# Altium PCB PCB-MAKEY_MAKEY_PTITTEAM_v1.6.PcbDoc
Units mil, origin at the board's own origin, x right, y up, seen from the top; angles counter-clockwise.
Board outline 3500 x 1950 mil, 2 copper layers (Top Layer, Bottom Layer); 49 components, 59 nets, 156 pads, 46 vias.
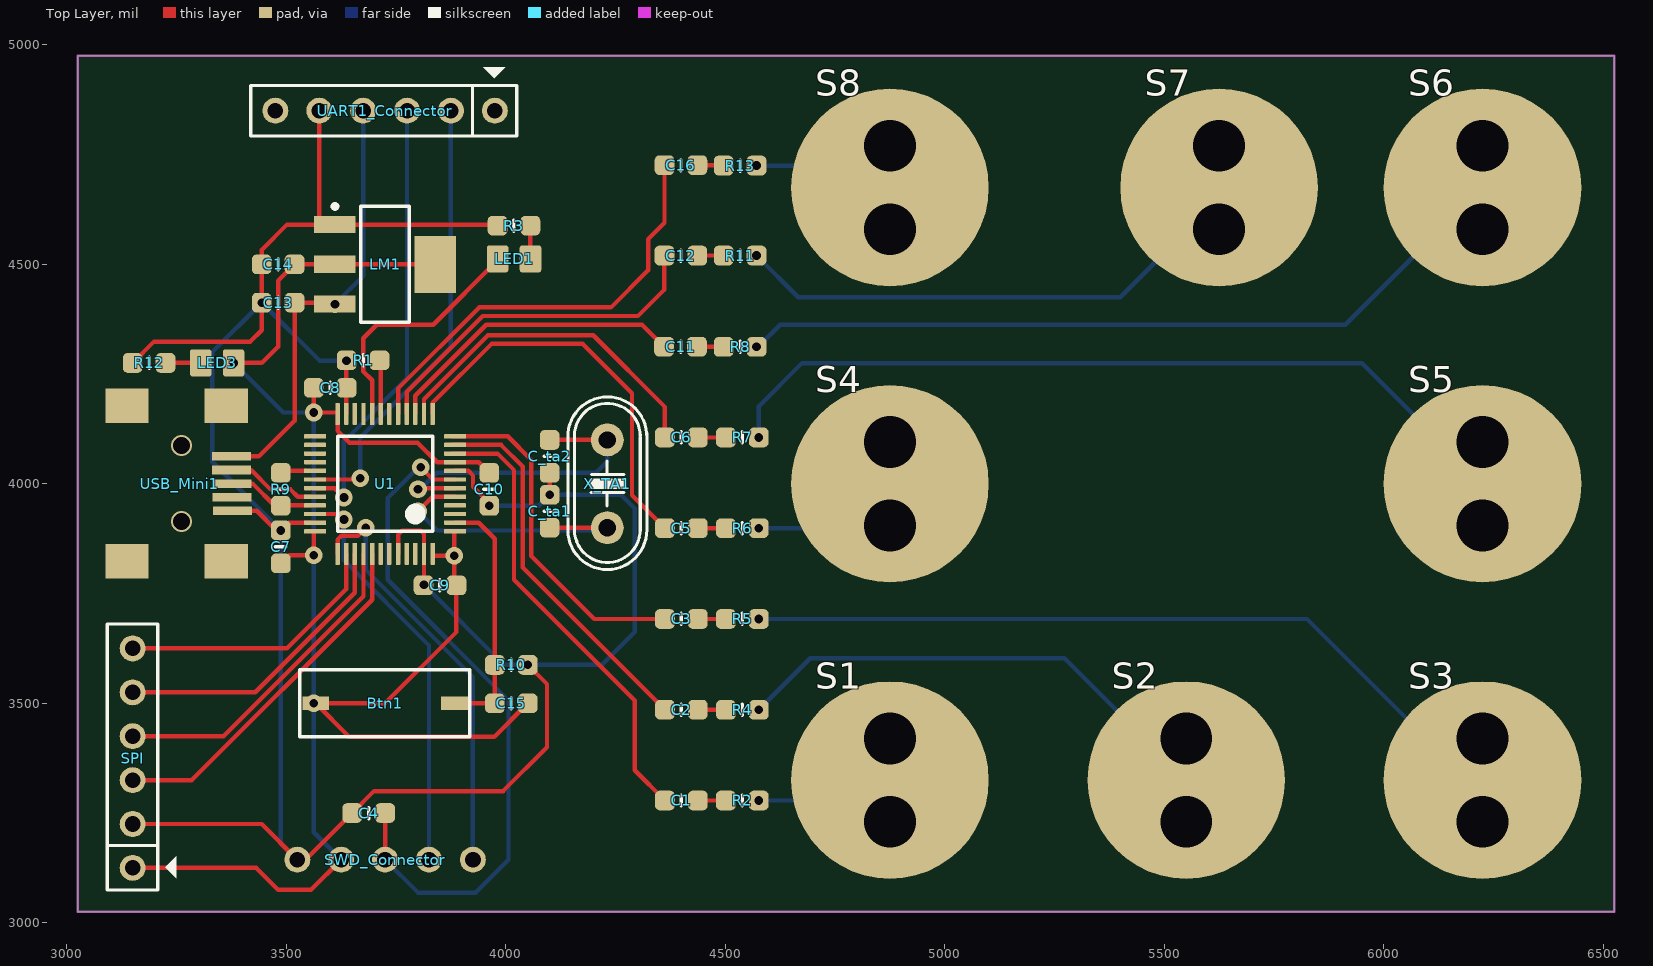
[diagram p0: Top Layer view]
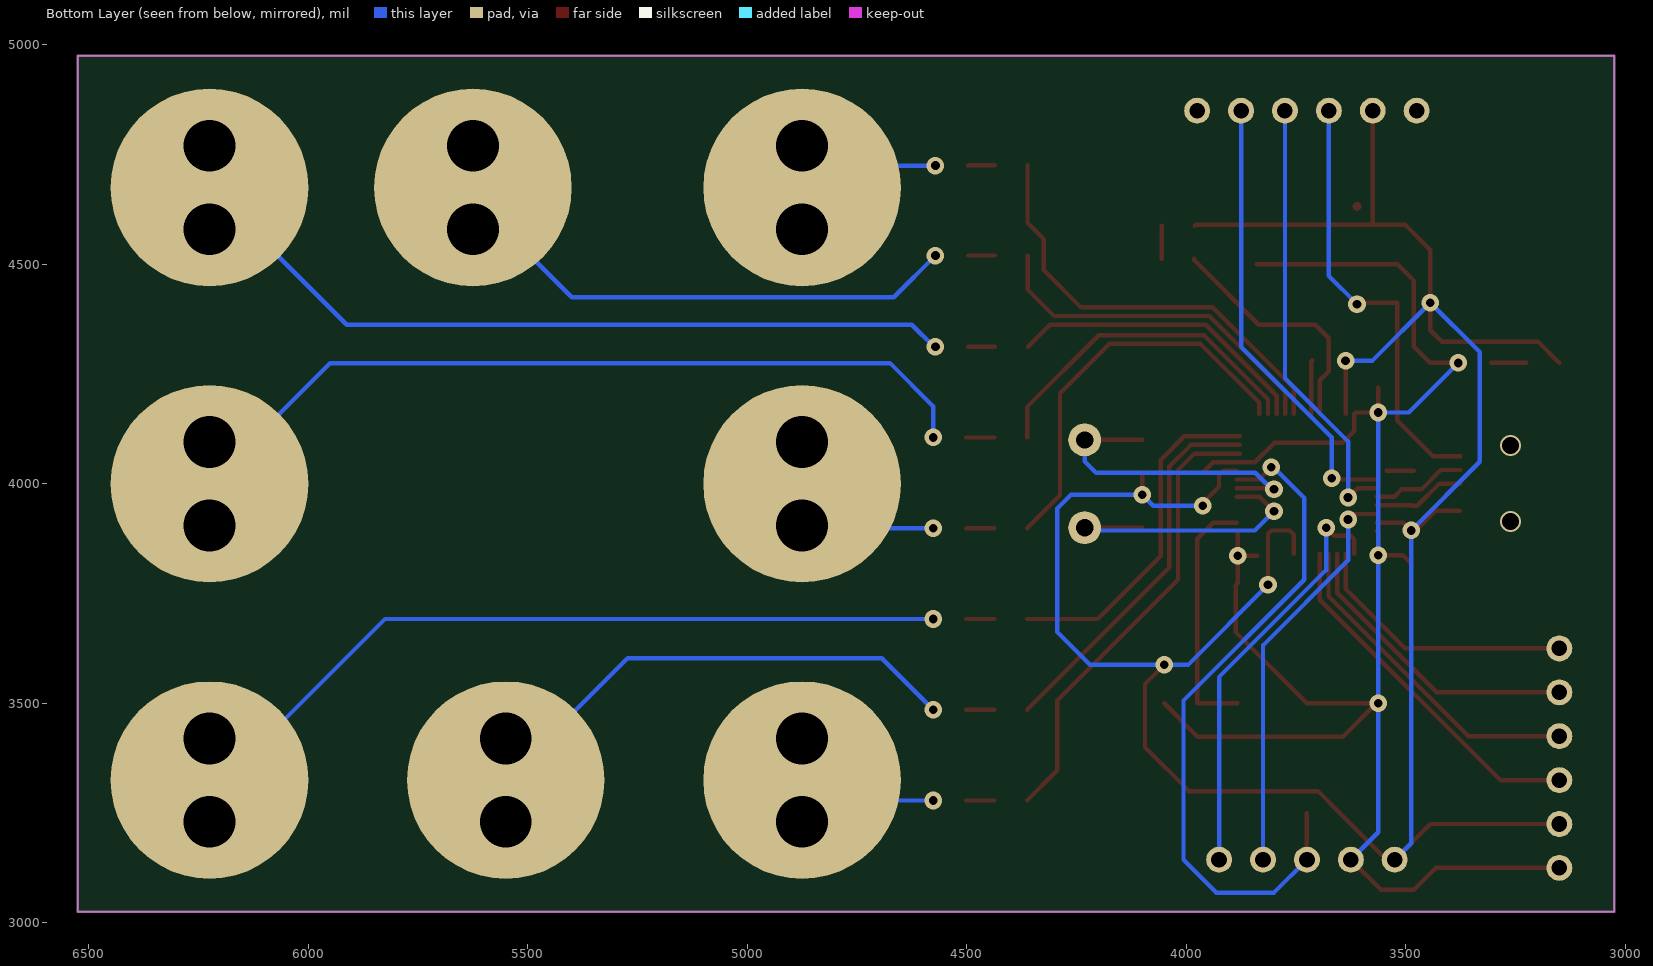
[diagram p1: Bottom Layer view, seen from below]

## Layer stack, top to bottom
Top Solder: solder mask 0.4, Solder Resist, Dk 3.5
Top Layer: signal copper 1.4
Dielectric1: dielectric 12.6, FR-4, Dk 4.8
Bottom Layer: signal copper 1.4
Bottom Solder: solder mask 0.4, Solder Resist, Dk 3.5

## Board outline
3025,3025 3025,4975 6525,4975 6525,3050 6525,3025 3025,3025

## Design rules (kind name [scope] priority, off if disabled: settings)
Clearance [All] p1: gap=9.68
PolygonConnect [All] p1: connectstyle=Relief reliefconductorwidth=10 reliefentries=4 polygonreliefangle="90 Angle" airgapwidth=10
RoutingVias [All] p1: holewidth=28 width=50 viastyle="Through Hole" minholewidth=28 minwidth=50 maxholewidth=28 maxwidth=50
SolderMaskExpansion [All] p1: expansion=4
Width [All] p1: maxlimit=10 minlimit=10 preferedwidth=10
30 further rules are at their usual default settings.

## Components (designator, comment, footprint, x,y, rotation, side; value= is the part's Value field where it differs from the comment)
Btn1 "Function" Button_SMD_2pin 3725,3500 r180 top
C1 "104" CAP-0603 4400,3278.55 r0 top
C2 "104" CAP-0603 4400,3485.31 r0 top
C3 "104" CAP-0603 4400,3692.07 r0 top
C4 "104" CAP-0603 3687.5,3250 r180 top
C5 "104" CAP-0603 4400,3898.83 r0 top
C6 "104" CAP-0603 4400,4105.59 r0 top
C7 "1uF" CAP-0603 3487.5,3856.25 r270 top
C8 "1uF" CAP-0603 3600,4218.75 r0 top
C9 "1uF" CAP-0603 3850,3768.75 r0 top
C10 "1uF" CAP-0603 3962.5,3987.5 r270 top
C11 "104" CAP-0603 4398,4312.35 r0 top
C12 "104" CAP-0603 4398.75,4520 r0 top
C13 "104" CAP-0603 3481.25,4412.5 r0 top
C14 "104" CAP-0603 3481.25,4500 r0 top
C15 "104" CAP-0603 4012.5,3500 r0 top
C16 "104" CAP-0603 4399,4725.87 r0 top
C_ta1 "22pF" CAP-0603 4100,3937.5 r90 top
C_ta2 "22pF" CAP-0603 4100,4062.5 r270 top
LED1 "color" LED-0805 4018.75,4512.5 r0 top
LED3 "color" LED-0805 3342.44,4275.35 r180 top
LM1 "LM1117" SOT223-4N 3725,4500 r0 top
R1 "0R" RES-0603 3675,4281.25 r0 top
R2 "0R" RES-0603 4538.75,3278.55 r0 top
R3 "1k2" RES-0603 4018.5,4588 r0 top
R4 "0R" RES-0603 4538.75,3485 r0 top
R5 "0R" RES-0603 4538.75,3692.07 r0 top
R6 "0R" RES-0603 4538.75,3898.83 r0 top
R7 "0R" RES-0603 4538.75,4105.59 r0 top
R8 "0R" RES-0603 4533.75,4312 r0 top
R9 "1k5" RES-0603 3487.5,3987.5 r90 top
R10 "10k" RES-0603 4012.5,3587.5 r180 top
R11 "0R" RES-0603 4533.75,4520 r0 top
R12 "1k2" RES-0603 3187.44,4275.35 r0 top
R13 "0R" RES-0603 4533.75,4725 r0 top
S1 "C_Sensor" SOP2 4875,3325 r0 top
S2 "C_Sensor" SOP2 5550,3325 r0 top
S3 "C_Sensor" SOP2 6225,3325 r0 top
S4 "C_Sensor" SOP2 4875,4000 r0 top
S5 "C_Sensor" SOP2 6225,4000 r0 top
S6 "C_Sensor" SOP2 6225,4675 r0 top
S7 "C_Sensor" SOP2 5625,4675 r0 top
S8 "C_Sensor" SOP2 4875,4675 r0 top
SPI "" JP6 3150,3125 r90 top
SWD_Connector "" JP_5 3725,3143.75 r180 top
U1 "STM32F103C8T6" LQFP48_N 3725,4000 r180 top
UART1_Connector "Connector" JP6 3975,4850 r180 top
USB_Mini1 "" Micro_USB 3375,4062.5 r270 top
X_TA1 "8Mhz" XT2 4231.25,4000 r270 top

## Footprints (in the part's own frame and the unit in brackets; to place one, negate y for a bottom-side part, rotate by r counter-clockwise, add the part's x,y. Pads: shape width x height; smd on the part's side, far side on the other; paste and mask are expansions set on the pad)
Button_SMD_2pin [mm] "Button smd 2pin"
  rect 1.55x0.8 smd: 1(-4.013,0) 2(4.013,0)
  silkscreen extent -4.9,-1.93 4.93,1.93, body extent -4.05,-1.8 3.95,1.8, height 2.53
CAP-0603 [mil] "Chip Capacitor; Body 2 x 1.2 mm (LxW typ)"
  rrect50% 45x45 smd: 1(-37.5,0) 2(37.5,0)
  silkscreen extent 0,-12 0,13, body extent -39,-24 39,24, height 28
JP6 [mm] "JP6"
  round 1.5 hole 0.9: 1(0,0) 2(2.54,0) 3(5.08,0) 4(7.62,0) 5(10.16,0) 6(12.7,0)
  silkscreen extent -1.27,-2.51 14.12,1.47, body extent -1.22,-1.27 13.92,1.23, height 8.22
JP_5 [mm]
  round 1.5 hole 0.914: 1(-5.08,0) 2(-2.54,0) 3(0,0) 4(2.54,0) 5(5.08,0)
  body extent -6.3,-1.36 6.3,1.14, height 8.22
LED-0805 [mil] "Chip LED; Body 2 x 1.2 mm (LxW typ)"
  rrect25% 49.27x61.77 smd: 1(-37.5,0) 2(37.5,0)
  body extent -39,-25 39,25, height 31
LQFP48_N [mm] "Thin QFP, 48-Leads, Body 7x7mm, Pitch 0.5mm, IPC Medium Density"
  rrect25% 1.27x0.254 smd: 1(-4.05,2.75) 2(-4.05,2.25) 3(-4.05,1.75) 4(-4.05,1.25) 5(-4.05,0.75) 6(-4.05,0.25) 7(-4.05,-0.25) 8(-4.05,-0.75) 9(-4.05,-1.25) 10(-4.05,-1.75) 11(-4.05,-2.25) 12(-4.05,-2.75) 25(4.05,-2.75) 26(4.05,-2.25) 27(4.05,-1.75) 28(4.05,-1.25) 29(4.05,-0.75) 30(4.05,-0.25) 31(4.05,0.25) 32(4.05,0.75) 33(4.05,1.25) 34(4.05,1.75) 35(4.05,2.25) 36(4.05,2.75)
  rrect25% 0.254x1.27 smd: 13(-2.75,-4.05) 14(-2.25,-4.05) 15(-1.75,-4.05) 16(-1.25,-4.05) 17(-0.75,-4.05) 18(-0.25,-4.05) 19(0.25,-4.05) 20(0.75,-4.05) 21(1.25,-4.05) 22(1.75,-4.05) 23(2.25,-4.05) 24(2.75,-4.05) 37(2.75,4.05) 38(2.25,4.05) 39(1.75,4.05) 40(1.25,4.05) 41(0.75,4.05) 42(0.25,4.05) 43(-0.25,4.05) 44(-0.75,4.05) 45(-1.25,4.05) 46(-1.75,4.05) 47(-2.25,4.05) 48(-2.75,4.05)
  silkscreen extent -2.75,-2.75 2.75,2.75, body extent -3.5,-3.5 3.5,3.5, height 1.6
Micro_USB [mm] "Micro usb connector"
  rect 2x2.5 smd: 0(-2.929,-6.045) 0(-2.925,-0.305) 0(6.071,-6.045) 0(6.075,-0.305)
  rect 0.5x2.25 smd: 1(0,0) 2(0.787,0.013) 3(1.575,0.025) 4(2.362,0.038) 5(3.15,0.051)
  body extent -3.78,-8.83 6.92,0.37, height 3.95
RES-0603 [mil] "Chip Resistor; Body 2 x 1.2 mm (LxW typ)"
  rrect50% 45x45 smd: 1(-37.5,0) 2(37.5,0)
  silkscreen extent 0,-12 0,12, body extent -39,-24 39,24, height 28
SOP2 [mil]
  round 450 all layers, no hole: 1(0,0)
SOT223-4N [mm]
  rect 2.4x1 smd: 1(-2.9,2.3) 2(-2.9,0) 3(-2.9,-2.3)
  rect 2.4x3.3 smd: 4(2.9,0)
  Top Layer circle w0.25: c-2.9,3.35 r0.125
  silkscreen extent -3.02,-3.35 1.4,3.47, body extent -3.39,-3.27 3.5,3.23, height 1.72
XT2 [mm] "Footpin for Crystal 2 pin"
  round 1.905 hole 1: 1(-2.54,0) 2(2.54,0)
  silkscreen extent -5.03,-2.29 4.96,2.29, body extent -5.93,-2.36 5.42,2.29, height 3.5

## Part data
Btn1: library part Button_SMD_2pin, "Switch button 2 pin"
C1 C2 C3 C4 C5 C6 C9 C10 C11 C13 C14 C15: library part CM, "Cap SMD"
C7 C8 C12 C16 C_ta1 C_ta2: library part CN0, "Cremic For Xtal 1pF => 100pF"
LED1 LED3: library part Led_SMD, "Led smd"
LM1: "3v3"
R1 R2 R3 R4 R5 R6 R7 R8 R10 R11 R12 R13: library part Res_SMD_0603, "Resistor smd 0603 type"
R9: library part R, "Resistor 1/4W"
SPI: library part SPI_Connector
SWD_Connector: library part Load_Program
U1: "STM32 ARM-based 32-bit MCU with 64 Kbytes Flash, 48-pin LQFP, Industrial Temperature"
UART1_Connector: library part USB2Com_Conn, "Connector to USB2Com module"
USB_Mini1: library part USB_M
X_TA1: library part XT2, "Crystal For all Crystal 2pin."

## Via types
v1: diameter 40, hole 19.68, Top Layer to Bottom Layer, tented both sides, 28 vias
v2: diameter 130, hole 118.11, Top Layer to Bottom Layer, 16 vias
v3: diameter 47.24, hole 39.37, Top Layer to Bottom Layer, tented both sides, 2 vias

## Nets (pads, with @x,y where several pads share a name; then routed paths per layer and width w, separated by ;. In a path a pad name is that pad's centre, name@x,y a point inside that pad or via, vN(x,y) a via of type N, cw(c..) or ccw(c..) an arc to the next point about the centre after c; other vN are vias at no path point)
GND: C4.2 C7.1 C8.2 C9.1 C10.2 C13.1 C14.1 C_ta1.2 C_ta2.2 LM1.1 R1.1 R3.1 R10.1 R12.1 SPI.2 SWD_Connector.5 U1.8 U1.23 U1.35 U1.44 U1.47 UART1_Connector.5 USB_Mini1.5 | length 6228.3
  Top Layer w10: R12.1 3198.59,4324 3418,4324 3443.75,4349.75 v1(3443.75,4412.5) C14.1 3443.75,4532.75 3501.55,4590.55 LM1.1@3575,4590.55 ; SPI.2 3443.75,3225 SWD_Connector.5 3543.75,3143.75 C4.2 3700,3300 3993.75,3300 4093.75,3400 4093.75,3543.75 v1(4050,3587.5) ; USB_Mini1.5 3432.5,3938.5 3477.25,3893.75 v1(3487.5,3893.75) 3505.17,3911.42 U1.35 ; UART1_Connector.5 LM1.1@3575,4590.55 ; U1.23@3636.42,4159.45 3636.42,4280.17 v1(3636.96,4280.71) R1.1 ; U1.44 3754.53,3883.76 3764.52,3893.75 3806.25,3893.75 3813.58,3886.42 U1.47 v1(3813.58,3769.83) C9.1 ; U1.8@3884.45,4029.52 3914.8,4029.52 3924.13,4020.19 3924.13,4019.94 3925.32,4018.75 3925.32,3993.43 3962.5,3956.25 v1(3962.5,3950) ; R3.1 3978.45,4590.55 LM1.1 LM1.1@3575,4590.55 ; v1(4100,3975) C_ta2.2
  Bottom Layer w10: SWD_Connector.5 3487.5,3181.25 v1(3487.5,3893.75) 3331.25,4050 3331.25,4300 v1(3443.75,4412.5) 3575.54,4280.71 v1(3636.96,4280.71) ; v1(3813.58,3769.83) 3995.91,3587.5 v1(4050,3587.5) 4218.75,3587.5 4293.75,3662.5 4293.75,3943.75 4262.5,3975 v1(4100,3975) 4075,3950 v1(3962.5,3950)
NetC1_2: C1.2 R2.1 | length 63.8
  Top Layer w10: C1.2 R2.1
NetC2_2: C2.2 R4.1 | length 63.9
  Top Layer w10: C2.2 4500.94,3485.31 R4.1
NetC3_2: C3.2 R5.1 | length 63.8
  Top Layer w10: C3.2 R5.1
NetC5_2: C5.2 R6.1 | length 63.8
  Top Layer w10: C5.2 R6.1
NetC6_2: C6.2 R7.1 | length 63.8
  Top Layer w10: C6.2 R7.1
NetC11_2: C11.2 R8.1 | length 60.9
  Top Layer w10: C11.2 4495.9,4312.35 R8.1
NetC12_2: C12.2 R11.1 | length 60
  Top Layer w10: C12.2 R11.1
NetC16_2: C16.2 R13.1 | length 60.1
  Top Layer w10: C16.2 4495.38,4725.87 R13.1
NetLED1_2: LED1.2 R3.2 | length 75.6
  Top Layer w10: R3.2 4056,4512.75 LED1.2
NetLED3_2: LED3.2 R12.2 | length 80
  Top Layer w10: R12.2 LED3.2
NetR2_2: R2.2 S1.1 | length 248.7
  Bottom Layer w10: v1(4576.25,3278.55) S1.1@4825,3278.55
  other v2: 4875,3230 4875,3420
NetR4_2: R4.2 S2.1 | length 1137.4
  Bottom Layer w10: v1(4576.25,3485) 4693.75,3602.5 5272.5,3602.5 S2.1
  other v2: 5550,3230 5550,3420
NetR5_2: R5.2 S3.1 | length 1800.8
  Bottom Layer w10: v1(4576.25,3692.07) 5825,3692.07 6192.07,3325 S3.1
  other v2: 6225,3230 6225,3420
NetR6_2: R6.2 S4.1 | length 340.7
  Bottom Layer w10: v1(4576.25,3898.83) 4773.83,3898.83 S4.1
  other v2: 4875,3905 4875,4095
NetR7_2: R7.2 S5.1 | length 1874.2
  Bottom Layer w10: v1(4576.25,4105.59) 4576.25,4176.25 4675,4275 5950,4275 S5.1
  other v2: 6225,3905 6225,4095
NetR8_2: R8.2 S6.1 | length 1804.1
  Bottom Layer w10: v1(4571.25,4312) 4574.5,4312 4625,4362.5 5912.5,4362.5 S6.1
  other v2: 6225,4580 6225,4770
NetR11_2: R11.2 S7.1 | length 1211.3
  Bottom Layer w10: v1(4571.25,4520) 4666.25,4425 5400,4425 5625,4650 S7.1
  other v2: 5625,4580 5625,4770
NetR13_2: R13.2 S8.1 | length 324.5
  Bottom Layer w10: v1(4571.25,4725) 4825,4725 S8.1
  other v2: 4875,4580 4875,4770
NRST: C4.1 SWD_Connector.3 U1.7 | length 1581.1
  Top Layer w10: SWD_Connector.3 C4.1 ; v1(3806.25,4037.5) 3833.91,4009.84 U1.7
  Bottom Layer w10: SWD_Connector.3 3800,3068.75 3931.25,3068.75 4006.25,3143.75 4006.25,3506.25 3731.25,3781.25 3731.25,3967.79 3800.96,4037.5 v1(3806.25,4037.5)
OSC_IN: C_ta1.1 U1.5 X_TA1.2 | length 681.3
  Top Layer w10: v1(3800,3937.5) 3832.97,3970.47 U1.5 ; C_ta1.1 X_TA1.2
  Bottom Layer w10: v1(3800,3937.5) 3843.75,3893.75 4218.75,3893.75 4225,3900 X_TA1.2
OSC_OUT: C_ta2.1 U1.6 X_TA1.1 | length 723.4
  Top Layer w10: v1(3800,3987.5) 3802.66,3990.16 U1.6 ; C_ta2.1 X_TA1.1
  Bottom Layer w10: v1(3800,3987.5) 3805.29,3987.5 3842.79,4025 4205.25,4025 4231.25,4051 X_TA1.1
PA0: C1.1 U1.10 | length 1051.2
  Top Layer w10: U1.10@3878.2,4068.9 3981.1,4068.9 4018.75,4031.25 4018.75,3781.25 4293.75,3506.25 4293.75,3347.3 C1.1
PA1: C2.1 U1.11 | length 868.9
  Top Layer w10: U1.11@3878.2,4088.58 3989.25,4088.58 4038.43,4039.4 4038.43,3809.38 C2.1
PA2: C3.1 U1.12 | length 784.8
  Top Layer w10: U1.12@3878.2,4108.27 4004.23,4108.27 4058.11,4054.39 4058.11,3835.64 4201.68,3692.07 C3.1
PA3: C5.1 U1.13 | length 919.9
  Top Layer w10: U1.13 3833.27,4184.44 3967.58,4318.75 4175,4318.75 4287.5,4206.25 4287.5,3973.83 C5.1
PA4: C6.1 U1.14 | length 779.6
  Top Layer w10: U1.14 3813.58,4192.59 3959.43,4338.43 4199.07,4338.43 4362.5,4175 C6.1
PA5: C11.1 U1.15 | length 695.7
  Top Layer w10: U1.15 3793.9,4200.73 3955.66,4362.5 4310.35,4362.5 C11.1
PA6: C12.1 U1.16 | length 810.7
  Top Layer w10: U1.16 3774.21,4208.88 3947.51,4382.18 4300.93,4382.18 4361.25,4442.5 C12.1
PA7: C16.1 U1.17 | length 993.6
  Top Layer w10: U1.17 3754.53,4217.03 3939.36,4401.86 4239.36,4401.86 4324.07,4486.57 4324.07,4557.18 4361.5,4594.61 C16.1
PA13: SWD_Connector.2 U1.34 | length 926.1
  Top Layer w10: U1.34 3618.9,3931.1 v1(3631.25,3918.75)
  Bottom Layer w10: v1(3631.25,3918.75) 3631.25,3825.59 3825,3631.84 SWD_Connector.2
PA14: SWD_Connector.1 U1.37 | length 965.4
  Top Layer w10: U1.37 3616.73,3872.98 3625,3881.25 3662.5,3881.25 v1(3681.25,3900)
  Bottom Layer w10: v1(3681.25,3900) 3681.25,3803.42 3925,3559.67 SWD_Connector.1
PA15: SPI.6 U1.38 | length 622.8
  Top Layer w10: SPI.6 3501.21,3625 3636.42,3760.21 U1.38
PB0: U1.18
PB1: R1.2 U1.19 | length 122.9
  Top Layer w10: R1.2 3715.15,4278.6 U1.19@3715.15,4159.45
PB2: LED1.1 U1.20 | length 563.3
  Top Layer w10: U1.20 3695.47,4235.78 3675.32,4255.93 3675.32,4331.57 3706.25,4362.5 3834.64,4362.5 3981.25,4509.11 LED1.1
PB3: SPI.5 U1.39 | length 688.6
  Top Layer w10: SPI.5 3429.04,3525 3656.1,3752.06 U1.39@3656.1,3840.55
PB4: SPI.4 U1.40 | length 754.5
  Top Layer w10: SPI.4 3356.87,3425 3675.79,3743.91 U1.40
PB5: SPI.3 U1.41 | length 820.4
  Top Layer w10: SPI.3 3284.7,3325 3695.47,3735.77 U1.41
PB6: U1.42
PB7: U1.43
PB8: U1.45
PB9: U1.46
PB10: U1.21
PB11: U1.22
PB12: U1.25
PB13: U1.26
PB14: U1.27
PB15: U1.28
PC13: Btn1.1 C15.1 R10.2 U1.2 | length 572.6
  Top Layer w10: Btn1.1 C15.1 R10.2 3975,3875 3938.58,3911.42 U1.2
PC14: U1.3
PC15: U1.4
USART1_RX: U1.31 UART1_Connector.3 | length 1015.4
  Top Layer w10: U1.31 3609.84,3990.16 v1(3631.25,3968.75)
  Bottom Layer w10: v1(3631.25,3968.75) 3631.25,4096.58 3775,4240.33 UART1_Connector.3
USART1_TX: U1.30 UART1_Connector.2 | length 1046.9
  Top Layer w10: U1.30 3678.59,4009.84 3675.94,4012.5 v1(3668.75,4012.5)
  Bottom Layer w10: v1(3668.75,4012.5) 3668.75,4106.25 3875,4312.5 UART1_Connector.2
USB_5V: C13.2 LM1.3 UART1_Connector.4 USB_Mini1.1 | length 1006.6
  Top Layer w10: USB_Mini1.1 3437.5,4062.5 3518.75,4143.75 C13.2 3607.78,4412.5 v1(3610.83,4409.45)
  Bottom Layer w10: v1(3610.83,4409.45) 3675,4473.62 UART1_Connector.4
USB_DISC: R9.2 U1.29 | length 62.5
  Top Layer w10: R9.2@3481.25,4029.53 U1.29@3543.75,4029.53
USBDM: U1.32 USB_Mini1.2 | length 215.3
  Top Layer w10: USB_Mini1.2 3419.89,4031.5 3464.21,3987.18 3509.49,3987.18 3526.2,3970.47 U1.32
USBDP: R9.1 U1.33 USB_Mini1.3 | length 210.8
  Top Layer w10: USB_Mini1.3 3423.06,4000.5 3473.56,3950 R9.1 3488.29,3950.79 U1.33
VCC: Btn1.2 C7.2 C8.1 C9.2 C10.1 C14.2 C15.2 LED3.1 LM1.2 LM1.4 SPI.1 SWD_Connector.4 U1.1 U1.9 U1.24 U1.36 U1.48 | length 4326.5
  Top Layer w10: SPI.1 3431.25,3125 3481.25,3075 3556.25,3075 SWD_Connector.4 ; v1(3379.94,4275.35) 3444.1,4275.35 3481.25,4312.5 3481.25,4462.5 C14.2 LM1.2 ; C7.2 3506.25,3837.5 v1(3562.5,3837.5) 3562.5,3888.68 U1.36 ; C8.1 v1(3562.5,4162.5) 3613.68,4162.5 U1.24 3616.73,4120.77 3643.75,4093.75 3799.04,4093.75 3843.58,4049.21 U1.9 3938.29,4049.21 C10.1 ; LM1.2 LM1.4 ; U1.48@3837.88,3835.94 v1(3882.81,3835.94) ; U1.1 3881.25,3888.53 3882.81,3886.97 v1(3882.81,3835.94) ; C15.2 3974,3424 3643,3424 Btn1.2 3725,3500 3887.5,3662.5 C9.2 3882.81,3773.44 v1(3882.81,3835.94)
  Bottom Layer w10: v1(3379.94,4275.35) 3492.8,4162.5 v1(3562.5,4162.5) v1(3562.5,3837.5) v1(3562.5,3500) 3562.5,3206.25 SWD_Connector.4 ; v1@3881.25,3837.5 v1(3882.81,3835.94)
pads on no net: UART1_Connector.1 UART1_Connector.6 USB_Mini1.0 USB_Mini1.4
copper on no net:
  other v3: 3261.43,3913.89 3261.43,4087.11

## Keep-outs
Keep-Out Layer:
  lines w5: 3025,3025 3025,4975 6525,4975 6525,3025 3025,3025

## Silkscreen, mask and mechanical layers (free items; w line width, h text height)
Mechanical 13:
  lines w10: 3025,4000 3043.75,4000 6525,4000